# Altium PCB PCB3.PcbDoc
Units mm, origin at the board's own origin, x right, y up, seen from the top; angles counter-clockwise.
Board outline 58.75 x 34.1 mm, 2 copper layers (Top Layer, Bottom Layer); 56 components, 29 nets, 139 pads, 60 vias.
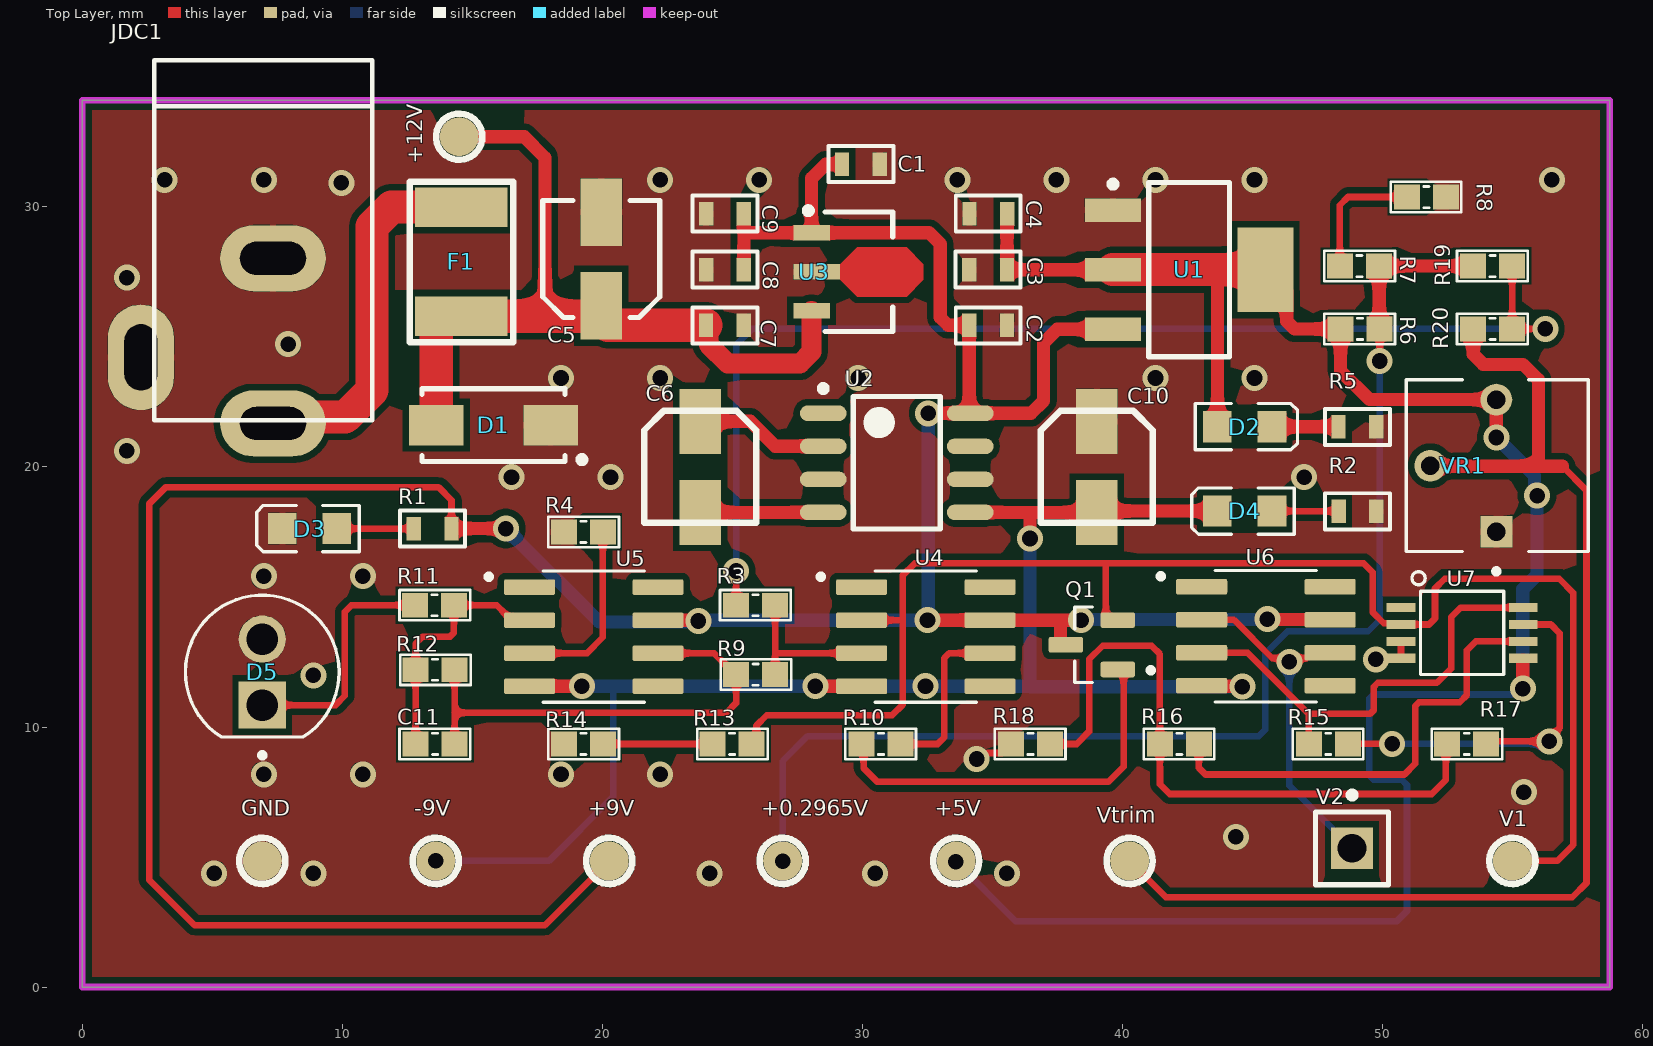
[diagram p0: Top Layer view]
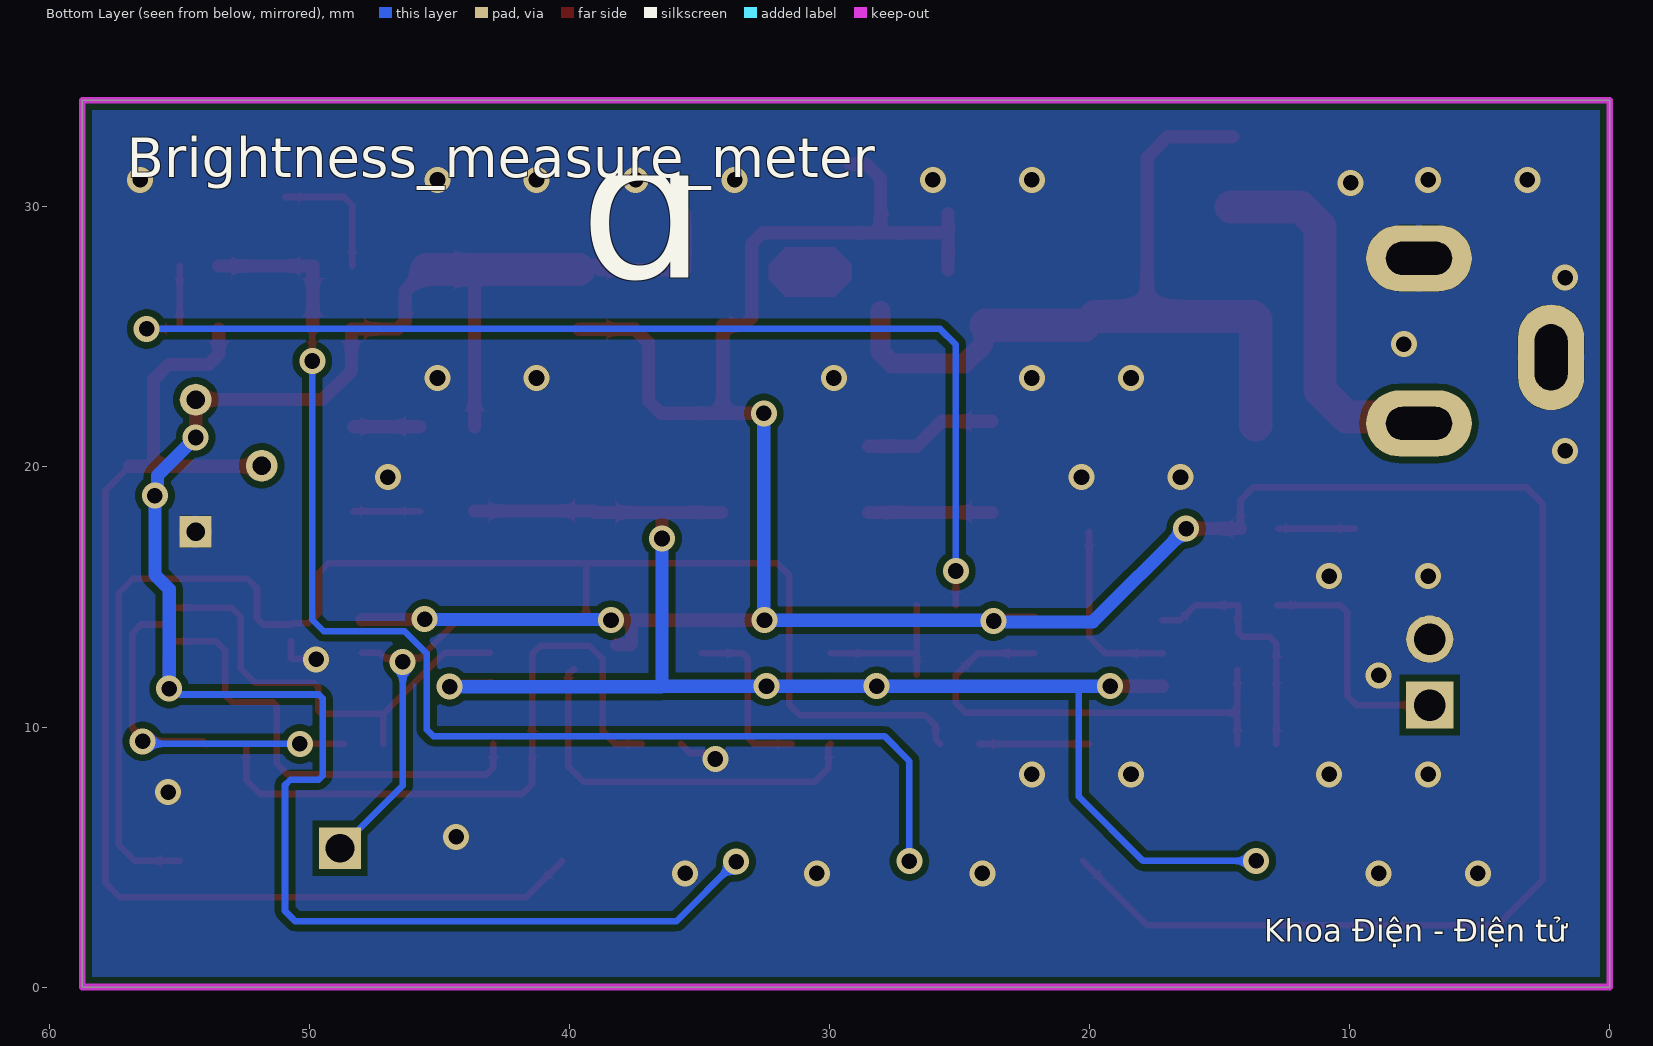
[diagram p1: Bottom Layer view, seen from below]
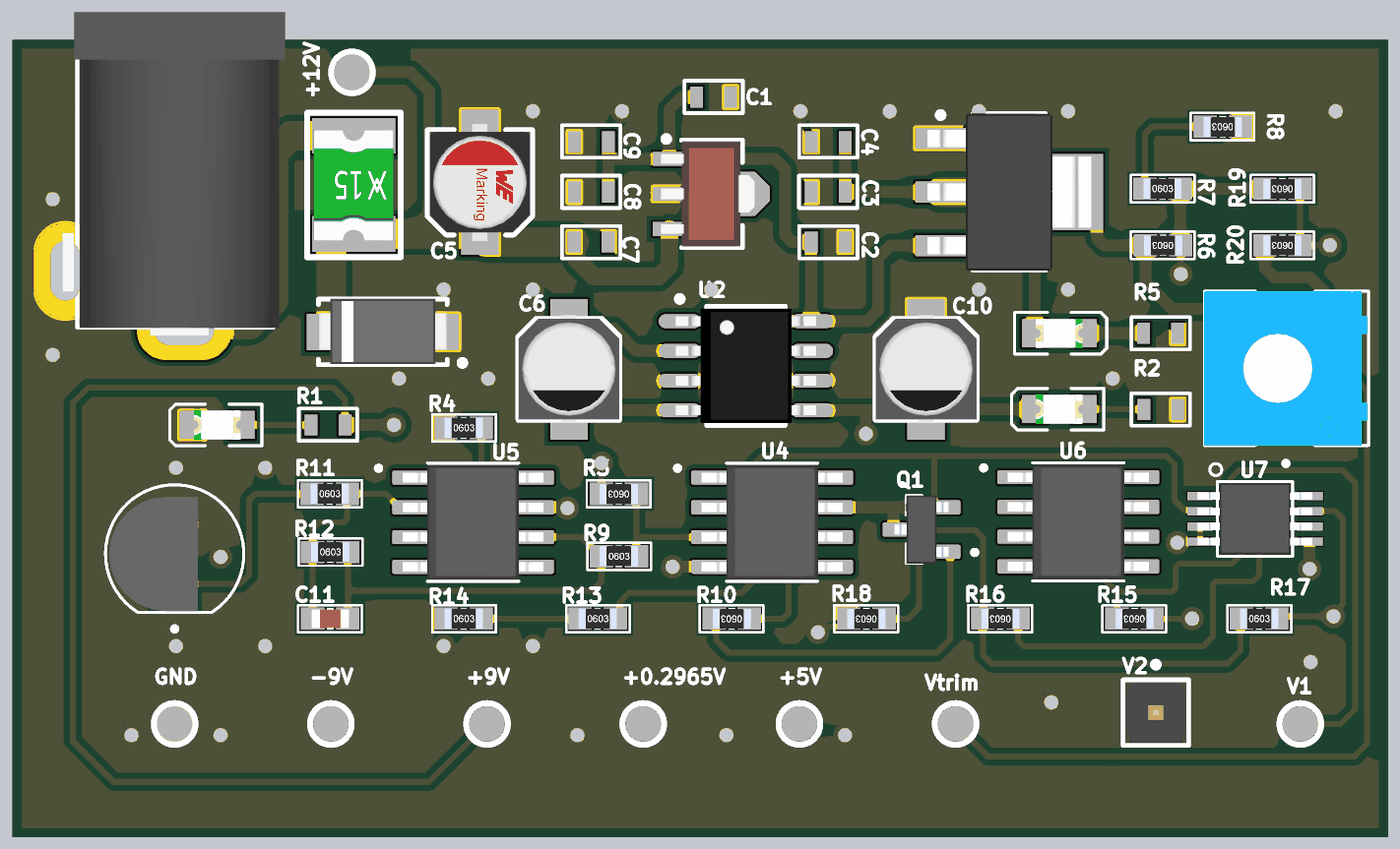
[diagram p2: 3D render of the assembled board from above, using the file's embedded part models]

## Layer stack, top to bottom
Top Solder: solder mask 0.0102, Solder Resist, Dk 3.5
Top Layer: signal copper 0.0356
Dielectric 1: dielectric 0.32, FR-4, Dk 4.8
Bottom Layer: signal copper 0.0356
Bottom Solder: solder mask 0.0102, Solder Resist, Dk 3.5

## Board outline
0,0 0,34.1 58.75,34.1 58.75,0

## Design rules (kind name [scope] priority, off if disabled: settings)
Clearance [All] p1: gap=0.254 ignorepadtopadclearanceinfootprint=FALSE
PlaneClearance [InNet('GND')] p1: clearance=0.508
PolygonConnect [InNet('GND') vs InNet('+12V')] p1: connectstyle=Direct reliefconductorwidth=0.254 reliefentries=4 polygonreliefangle="90 Angle" airgapwidth=0.254
RoutingVias [All] p1: holewidth=0.6 width=1 viastyle="Through Hole" minholewidth=0.6 minwidth=1 maxholewidth=0.6 maxwidth=1
SolderMaskExpansion [All] p1: expansion=0.102 istentingtop=FALSE
SupplyNets "Schematic Supply Nets_6" [InNet('Vtrim')] p1: voltage=0.000
SupplyNets "Schematic Supply Nets_5" [InNet('+9V')] p2: voltage=0.000
SupplyNets "Schematic Supply Nets_4" [InNet('+0.2965V')] p3: voltage=0.000
SupplyNets "Schematic Supply Nets_3" [InNet('GND')] p4: voltage=0.000
SupplyNets "Schematic Supply Nets_2" [InNet('+12V')] p5: voltage=0.000
SupplyNets "Schematic Supply Nets_1" [InNet('-9V')] p6: voltage=0.000
SupplyNets "Schematic Supply Nets" [InNet('+5V')] p7: voltage=0.000
UnRoutedNet [All] p1: checkbadconnections=TRUE
Width [All] p1: maxlimit=1.27 minlimit=0.254 preferedwidth=0.508 minimp=50.000000 maximp=50.000000 favimp=50.000000
28 further rules are at their usual default settings.

## Classes and differential pairs
component class Power_supply: +0.2965V +5V +9V +12V -9V C1 C2 C3 C4 C5 C6 C7 C8 C9 C10 D1 D2 D3 D4 F1 GND JDC1 R1 R2 R5 R6 R7 R8 U1 U2 U3 VR1 Vtrim
component class Measure: C11 "C 11" D5 Q1 R3 R4 R9 R10 R11 R12 R13 R14 R15 R16 R17 R18 R19 R20 U4 U5 U6 U7 V1 V2

## Components (designator, comment, footprint, x,y, rotation, side; value= is the part's Value field where it differs from the comment)
+0.2965V "Test_Point" TP_2MM 26.94,4.85 r90 top
+5V "Test_Point" TP_2MM 33.61,4.85 r0 top
+9V "Test_Point" TP_2MM 20.269,4.85 r0 top
+12V "Test_Point" TP_2MM 14.5,32.7 r180 top
-9V "Test_Point" TP_2MM 13.599,4.85 r0 top
C1 "10uF" CAP_0603 29.948,31.644 r0 top
C2 "100nF" CAP_0603 34.841,25.45 r180 top
C3 "10uF" CAP_0603 34.841,27.586 r0 top
C4 "100nF" CAP_0603 34.846,29.735 r0 top
C5 "22uF" WCAP-ASLI_D4H5.5 19.964,27.999 r270 top
C6 "10uF" "tu nhom 4 (b)" 23.767,20.004 r270 top
C7 "1uF" CAP_0603 24.717,25.45 r180 top
C8 "1uF" CAP_0603 24.723,27.586 r0 top
C9 "100nF" CAP_0603 24.723,29.735 r0 top
C10 "10uF" "tu nhom 4 (b)" 39.02,20.004 r270 top
C11 "220pF" "Tu 0603" 13.574,9.347 r180 top
D1 "D Schottky" SS34 15.818,21.606 r180 top
D2 "LED SMD" LED_0805_Blue 44.708,21.55 r0 top
D3 "LED SMD" LED_0805_Blue 8.748,17.63 r180 top
D4 "LED SMD" LED_0805_Blue 44.708,18.303 r180 top
D5 "SFH206K" SFH206K 6.928,12.366 r90 top
F1 "16V, 2.5A" Fuse_SMD_1812 14.575,27.874 r270 top
GND "Test_Point" TP_2MM 6.928,4.85 r0 top
JDC1 "Jac DC" DC0 4.8,24.85 r270 top
Q1 "LN2302LT1G" SOT95P240X120-3N 38.827,13.162 r180 top
R1 "5.6k" resistor_0603 13.478,17.63 r0 top
R2 "5.6k" resistor_0603 49.045,18.289 r0 top
R3 "1k" "tro smd 0603" 25.9,14.685 r180 top
R4 "2.7k" "TRO SMD 0603" 19.273,17.503 r0 top
R5 "5.6k" resistor_0603 49.039,21.55 r180 top
R6 "162k" "TRO SMD 0603" 49.141,25.309 r180 top
R7 "10.2k" "TRO SMD 0603" 49.115,27.727 r0 top
R8 "12R" "TRO SMD 0603" 51.692,30.381 r180 top
R9 "1k" "tro smd 0603" 25.9,12.015 r0 top
R10 "10R" "Tro smd 0603" 30.722,9.347 r180 top
R11 "10R" "Tro smd 0603" 13.548,14.685 r0 top
R12 "2.7k" "TRO SMD 0603" 13.574,12.198 r0 top
R13 "62R" "TRO SMD 0603" 24.998,9.347 r0 top
R14 "4.7R" "TRO SMD 0603" 19.273,9.347 r0 top
R15 "5.6k" "TRO SMD 0603" 47.921,9.347 r180 top
R16 "0R" "tro smd 0603" 42.197,9.347 r180 top
R17 "3.9k" "TRO SMD 0603" 53.245,9.347 r0 top
R18 "0R" "tro smd 0603" 36.472,9.347 r180 top
R19 "0R" "tro smd 0603" 54.243,27.727 r180 top
R20 "0R" "tro smd 0603" 54.243,25.309 r180 top
U1 "AMS1117-5V" "AMS1117-3.3V SOT223" 42.57,27.586 r0 top
U2 "ICL7662CBA-T" "SOP 8" 31.325,20.159 r0 top
U3 "78L09" SOT89 29.853,27.504 r0 top
U4 "OPA188AIDR" SOIC127P599X175-8N 32.446,13.473 r0 top
U5 "OPA188AIDR" SOIC127P599X175-8N 19.675,13.473 r0 top
U6 "OPA188AIDR" SOIC127P599X175-8N 45.522,13.49 r0 top
U7 "AD8237ARMZ" AD8237ARMZ 53.068,13.618 r270 top
V1 "Test_Point" TP_2MM 55.002,4.85 r0 top
V2 "JP 1x1 2.54" "JP 1x1 DT" 48.835,5.334 r0 top
VR1 "3362P-1-503" TRIM_3362P-1-503 54.385,20.05 r90 top
Vtrim "Test_Point" TP_2MM 40.281,4.85 r90 top

## Footprints (in the part's own frame and the unit in brackets; to place one, negate y for a bottom-side part, rotate by r counter-clockwise, add the part's x,y. Pads: shape width x height; smd on the part's side, far side on the other; paste and mask are expansions set on the pad)
AD8237ARMZ [mm]
  rect 0.35x1.1 smd mask+0.05: +IN(-0.325,-2.35) +VS(0.975,2.35) -IN(0.325,-2.35) -VS(0.975,-2.35) BW(-0.975,-2.35) FB(-0.325,2.35) REF(0.325,2.35) VOUT(-0.975,2.35)
  silkscreen extent -2.36,-1.93 1.6,1.6, body extent -1.5,-2.45 1.5,2.45, height 1.1
"AMS1117-3.3V SOT223" [mm] "SOT223, 4-Leads, Body 6.51x7.00mm, Pitch 2.29mm"
  rect 2.15x0.9 smd: 1(-2.93,2.29) 2(-2.93,0) 3(-2.93,-2.29)
  rect 2.15x3.25 smd: 4(2.93,0)
  silkscreen extent -3.05,-3.35 1.55,3.41, body extent -3.5,-3.35 3.5,3.35, height 1.8
CAP_0603 [mm]
  rect 0.55x0.9 smd: 1(-0.725,0) 2(0.725,0)
  silkscreen extent -1.25,-0.69 1.24,0.7, body extent -0.8,-0.45 0.8,0.45, height 0.5
DC0 [mil] "Jac DC input"
  oval 100x160 hole 50 slot 100 at 90 deg: 1(125,100) 2(-125,100)
  oval 160x100 hole 50 slot 100 at 0 deg: 3(25,-100)
  silkscreen extent -425,-80 120,250, body extent -410,-105 134,269, height 434
Fuse_SMD_1812 [mil] "Fuse SMD, size 1812"
  rect 60x140 smd: 0(-83.41,0) 1(82,0)
  silkscreen extent -122,-78 121,79, body extent -93,-67 93,67, height 18
"JP 1x1 DT" [mm] "1pins, 1 row, straight, gold plating"
  rect 1.6x1.6 hole 1.1: 1(0,0)
  silkscreen extent -1.4,-1.4 1.4,2.17, body extent -1.27,-1.27 1.27,1.27, height 8.54
LED_0805_Blue [mm]
  rect 1.1x1.2 smd: 1(-1.05,0) 2(1.05,0)
  silkscreen extent -1.91,-0.89 2.03,0.89, body extent -1,-0.63 1,0.62, height 0.68
resistor_0603 [mm]
  rect 0.55x0.9 smd: 1(-0.725,0) 2(0.725,0)
  silkscreen extent -1.25,-0.69 1.24,0.7, body extent -0.8,-0.45 0.8,0.45, height 0.5
SFH206K [mm]
  round 1.815 hole 1.21: A(1.016,0)
  rect 1.815x1.815 / inner round 1.815 / far side rect 1.815x1.815 hole 1.21: C(-1.524,0)
  silkscreen extent -3.55,-2.96 2.7,2.96, body extent -2.7,-1 2.2,2.8, height 7
SOIC127P599X175-8N [mm]
  rrect25% 1.97x0.6 smd: 1(-2.47,1.905) 2(-2.47,0.635) 3(-2.47,-0.635) 4(-2.47,-1.905) 5(2.47,-1.905) 6(2.47,-0.635) 7(2.47,0.635) 8(2.47,1.905)
  silkscreen extent -4.14,-2.52 1.95,2.52, body extent -3.01,-2.45 3.01,2.45, height 1.63
"SOP 8" [mm] "SOIC, 8-Leads, Body 4.9x3.9mm, Pitch 1.27mm, IPC High Density"
  oval 1.8x0.6 smd: 1(-2.825,1.905) 2(-2.825,0.635) 3(-2.825,-0.635) 4(-2.825,-1.905) 5(2.825,-1.905) 6(2.825,-0.635) 7(2.825,0.635) 8(2.825,1.905)
  silkscreen extent -2.95,-2.55 1.68,2.98, body extent -2.99,-2.45 3,2.45, height 1.6
SOT89 [mm] "SOT89, 3-Leads, Body 4.55x2.55mm, Pitch 1.50mm, Lead Span 4.1mm, IPC Medium Density"
  rect 1.4x0.6 smd: 1(-1.8,1.5) 3(-1.8,-1.5)
  rect 1.8x0.6 smd: 2(-1.6,0)
  Top Layer region: -0.7,0.3 -0.05,0.95 1.85,0.95 2.5,0.3 2.5,-0.3 1.85,-0.95 -0.05,-0.95 -0.7,-0.3
  silkscreen extent -2.05,-2.3 1.32,2.47, body extent -2.16,-2.25 1.84,2.25, height 1.5
SOT95P240X120-3N [mm]
  rrect25% 1.32x0.6 smd: 1(-1,0.95) 2(-1,-0.95) 3(1,0)
  silkscreen extent -2.37,-1.45 0.65,1.45, body extent -1.15,-1.46 1.15,1.46, height 1.21
SS34 [mm]
  rect 2.1x1.55 smd: 1(-2.2,0) 2(2.2,0)
  silkscreen extent -3.53,-1.4 2.75,1.45, body extent -2.75,-1.42 2.75,1.38, height 2.3
TP_2MM [mm] "Test point, 2mm."
  round 1.5 smd: 1(0,0)
  silkscreen extent -0.89,-0.89 0.89,0.89
TRIM_3362P-1-503 [mm]
  rect 1.222x1.222 hole 0.714: 1(-2.54,0)
  round 1.222 hole 0.714: 2(0,2.54) 3(2.54,0)
  silkscreen extent -4.16,-3.53 3.3,3.47, body extent -3.3,-3.49 3.3,3.49, height 4.88
"tro smd 0603" [mm] "Chip Capacitor, 2-Leads, Body 1,60x0,80mm, IPC Medium Density"
  rect 1x0.95 smd mask+0.076: 1(-0.75,0) 2(0.75,0)
  silkscreen extent -1.35,-0.58 1.37,0.58, body extent -0.82,-0.42 0.82,0.43, height 0.44
"TRO SMD 0603" [mm] "Chip Capacitor, 2-Leads, Body 1,60x0,80mm, IPC Medium Density"
  rect 1x0.95 smd mask+0.076: 1(-0.75,0) 2(0.75,0)
  silkscreen extent -1.35,-0.58 1.37,0.58, body extent -0.82,-0.42 0.82,0.43, height 0.44
"Tro smd 0603" [mm] "Chip Capacitor, 2-Leads, Body 1,60x0,80mm, IPC Medium Density"
  rect 1x0.95 smd mask+0.076: 1(-0.75,0) 2(0.75,0)
  silkscreen extent -1.35,-0.58 1.37,0.58, body extent -0.82,-0.42 0.82,0.43, height 0.44
"Tu 0603" [mm] "Chip Capacitor, 2-Leads, Body 1,60x0,80mm, IPC Medium Density"
  rect 1x0.95 smd mask+0.076: 1(-0.75,0) 2(0.75,0)
  silkscreen extent -1.35,-0.58 1.37,0.58, body extent -0.8,-0.4 0.8,0.4, height 0.9
"tu nhom 4 (b)" [mm]
  rect 2.5x1.6 smd: 1(-1.75,0) 2(1.75,0)
  silkscreen extent -2.15,-2.15 2.15,2.15, body extent -2.31,-2.15 2.29,2.15, height 3.91
WCAP-ASLI_D4H5.5 [mm] "Aluminium Electrolytic V-Chip SMT Capacitors, 4x5.5mm"
  rect 2.6x1.6 smd: 1(1.8,0) 2(-1.8,0)
  silkscreen extent -2.25,-2.25 2.25,2.25, body extent -2.5,-2.15 2.5,2.15, height 5.5

## Part data
+0.2965V +5V +9V +12V -9V GND V1 Vtrim: "Test point, 2mm radius"
C1 C3: library part 01060310010, "CAP, size 0603,10uF", Capacitance Tolerance=+/-10%, Operating Temperature="-55 to +125degC", Capacitance=10uF, ComponentLink1Description=Manufacturer, ComponentLink2Description=Datasheet, Mounting Technology=SMT, Packaging="Tape and Reel", Size=0603, Supply 2 Name=Thegioiic, Supply 2 URL=https://www.thegioiic.com/tu-gom-0603-10uf-16v
C2 C4 C9: library part 01060310410, "CAP, size 0603, 100nF", Capacitance Tolerance=+/-10%, Operating Temperature="-55 to +125degC", Capacitance=100nF, ComponentLink1Description=Manufacturer, ComponentLink1URL=http://www.we-online.de, ComponentLink2Description=Datasheet, ComponentLink2URL=https://www.we-online.com/catalog/datasheet/885012206095.pdf, Mounting Technology=SMT, Packaging="Tape and Reel", Size=0603, Supply 1 Name="Wurth Elektronik", Supply 1 SN=885012206095, Supply 1 URL=https://www.we-online.com/en/components/products/WCAP-CSGP-50VDC?sq=885012206095R#885012206095R, Supply 2 Name=Thegioiic, Supply 2 URL=https://www.thegioiic.com/tu-gom-0603-100nf-0-1uf-50v
C5: library part 865080340003, "V-Chip, D4 x H5.5mm, 22uF, 16V", Capacitance Tolerance=+/-20%, Leakage Current=3.52uA, Operating Temperature Max=105°C, Operating Temperature Min=-55°C, Rated Voltage (DC)=16V, Ripple Current=90mA, Capacitance=22uF, Category="Aluminum Electrolytic Capacitors", ComponentLink2Description="Datasheet Link", ComponentLink2URL=https://www.we-online.com/redexpert/spec/865080340003?ad, Diameter=4mm, Dissipation Factor=16%, Endurance=2000h, Height=5.5mm, Mount="Surface Mount", Packaging="Tape and Reel", Supply 1 Name=Mouser, Supply 1 SN=710-865080340003, Supply 1 URL=https://www.mouser.com/ProductDetail/Wurth-Elektronik/865080340003?qs=0KOYDY2FL2%252BowmC4S50IuQ%3D%3D, Supply 2 Name=thegioiic, Supply 2 URL=https://www.thegioiic.com/tu-nhom-smd-22uf-16v-4x5-4mm
C6 C10: library part "Tu Nhom 10uF 16V", "Dán", Chung_Loai=Dán, Don_Vi=Con, Ma_Hang=MH001458, So_Chan=2, Ten_Linh_Kien="Tụ Nhôm 10uF 16V 4x5MM"
C7 C8: library part 01060310510, "CAP, size 0603, 1uF", Capacitance Tolerance=+/-10%, Operating Temperature="-55 to +125degC", Capacitance=1uF, ComponentLink1Description=Manufacturer, ComponentLink1URL=http://www.we-online.de, ComponentLink2Description=Datasheet, ComponentLink2URL=https://www.we-online.com/components/products/datasheet/885012206126.pdf, Mounting Technology=SMT, Packaging="Tape and Reel", Size=0603, Supply 1 Name="Wurth Elektronik", Supply 1 SN=885012206126, Supply 1 URL=https://www.we-online.com/en/components/products/WCAP-CSGP-50VDC?sq=885012206126#885012206126, Supply 2 Name=Thegioiic, Supply 2 URL=https://www.thegioiic.com/tu-gom-0603-1uf-50v
C11: library part "Tu 0603 220pF 50V 10%", "Dán"
D1: "Schottky Diode", Code_JEDEC=DO-214-AA, LatestRevisionDate=17-Jul-2002, LatestRevisionNote="Re-released for DXP Platform.", PackageDescription="DO-214-AA/SMB; 2 C-Bend Leads; Body 5.3 x 3.6 mm, inc. leads (LxW)", PackageReference=SMB, Published=8-Jun-2000, Publisher="Altium Limited"
D2 D3 D4: "LED"
D5: "photodiode, 850nm", Package=None, Availability="In Stock", Check_prices=https://www.snapeda.com/parts/L08R5000Q1/LED+Technology/view-part/?ref=eda, MF="LED Technology", MP=L08R5000Q1, Price=None, SnapEDA_Link=https://www.snapeda.com/parts/L08R5000Q1/LED+Technology/view-part/?ref=snap
F1: library part 061812200008, "Resettable Fuse, Size 1812, 8V, 2A", Hold Current=2A, Manufacturer=Littelfuse, Threshold Current=100A, Threshold Voltage=8V, Trip Current=4A, ComponentLink1Description="Datasheet link", ComponentLink1URL=https://www.littelfuse.com/~/media/electronics/product_specifications/resettable_ptcs/littelfuse_ptc_minismdc300f_2_product_specification.pdf.pdf, ComponentLink2Description="Supply 1 URL", ComponentLink2URL=https://www.mouser.vn/ProductDetail/Littelfuse/MINISMDC200F-2?qs=F6FIpiMdEVbPu4q%2F42CC1w%3D%3D, ComponentLink3Description="Supply 2 URL", ComponentLink3URL=https://www.digikey.com/en/products/detail/littelfuse-inc/MINISMDC200F-2/1045898?s=N4IgTCBcDaIAQFkCSA5JBlBARAwmADPgGIC0EAugL5A, ComponentLink4Description="Supply 3 URL", ComponentLink4URL=https://www.thegioiic.com/cau-chi-tu-phuc-hoi-1812-8v-2a, Mounting Technology=SMT/SMD, Size=1812, Supply 1 Name=Mouser, Supply 1 SN=650-MINISMDC200F-2, Supply 2 Name=Digikey, Supply 2 SN=MINISMDC200F-2TR-ND, Supply 3 Name=Thegioiic, Supply 3 SN=N/A
JDC1: library part DCIN, "Jac DC input"
Q1: library part MOSFET, "SOT-23-3, MOSFET kênh N, 20V, 2.3A"
R1 R2 R5: library part 0006035621, "RES, 5.6k Ohm, size 0603, 1%", Rated Power=1/4W, Resistance Tolerant=+/-1%, ComponentLink1Description="Datasheet link", ComponentLink1URL=https://api.pim.na.industrial.panasonic.com/file_stream/main/fileversion/4484, ComponentLink2Description="Supply 1 URL", ComponentLink2URL=https://www.mouser.vn/ProductDetail/Panasonic/ERJ-UP3F5601V?qs=sGAEpiMZZMvdGkrng054twq3eZrCFN89ezYxgAsnxBTZYD17cS%252B65A%3D%3D, ComponentLink3Description="Supply 2 URL", ComponentLink3URL=https://www.digikey.com/en/products/detail/panasonic-electronic-components/ERJ-UP3F5601V/12092890, Mounting Technology=SMT, Resistance=5.6k, Size=0603, Supply 1 Name=Mouser, Supply 1 SN=667-ERJ-UP3F5601V, Supply 2 Name=Digikey, Supply 2 SN="10-ERJ-UP3F5601VTR-ND 10-ERJ-UP3F5601VCT-ND 10-ERJ-UP3F5601VDKR-ND"
R3 R9: library part "Tro 0603 1% 1k", "Dán", Chung_Loai=Dán, Don_Vi=Con, Ma_Hang=MH006334, So_Chan=2, Ten_Linh_Kien="Trở 0603 1% 1k"
R4 R12: library part "tro 0603 5% 2.7k", "dán"
R6: library part "Tro 0603 1% 162k", "Dán"
R7: library part "tro 0603 1% 10.2k", "Dán"
R8: library part "tro 0805 1% 12R", "Dán"
R10 R11: library part "Tro 0603 5% 10R", "Dán", Chung_Loai=Dán, Don_Vi=Con, Ma_Hang=MH006317, So_Chan=2, Ten_Linh_Kien="Trở 0603 5% 10R"
R13: library part "Tro 0603 1% 62R", "Dán"
R14: library part "Tro 0603 1% 4.7R", "Dán"
R15: library part "Tro 0603 1% 5.6k", "Dán"
R16 R18 R19 R20: library part "Tro 0603 1% 0R", "Dán", Chung_Loai=Dán, Don_Vi=Con, Ma_Hang=MH005792, So_Chan=2, Ten_Linh_Kien="Trở 0603 1% 0R"
R17: library part "Tro 0805 1% 3.9k", "Dán"
U1: "AMS1117-5V, OUT 5V 1A."
U2: Package=None, Availability=Unavailable, MF="{'manufacturer': u'Analog Devices Inc./Maxim Integrated'}", MP=ICL7662CBA+T, Price=None
U3: "78L09, OUT 9V, 0.1A"
U4 U5 U6: "Precision, Low-Noise, Rail-to-Rail Output, 36V Zero-Drift Operational Amplifier 8-SOIC -40 to 125", Package="SOIC-8 Texas Instruments", Digi-Key_Part_Number=296-41346-1-ND, DigiKey-Purchase-URL=https://snapeda.com/shop?store=DigiKey&id=1236132, MF="Texas Instruments", Mouser-Purchase-URL=https://snapeda.com/shop?store=Mouser&id=1236132, MP=OPA188AIDR, SnapEDA_Link=https://www.snapeda.com/parts/OPA188AIDR/Texas%20Instruments/view-part/1236132/?ref=snap, Texas_Instruments-Purchase-URL=https://snapeda.com/shop?store=Texas+Instruments&id=1236132
U7: "Micropower, Zero Drift, True Rail-to-Rail Instrumentation Amplifier", Package="MSOP-8 Analog Devices", Availability="In Stock", Check_prices=https://www.snapeda.com/parts/AD8237ARMZ/Analog+Devices/view-part/?ref=eda, MF="Analog Devices", MP=AD8237ARMZ, Price=None, Purchase-URL=https://pricing.snapeda.com/search?q=AD8237ARMZ&ref=eda, SnapEDA_Link=https://www.snapeda.com/parts/AD8237ARMZ/Analog+Devices/view-part/?ref=snap
V2: library part "JP 1x1 2.54 Duc Cong", "Cắm", Chung_Loai=Cắm, Don_Vi=Con, Ma_Hang=MH000904, Ten_Linh_Kien="Jump Đơn Đực 2.54MM 1x40P Cong Đứng"
VR1: "50 kOhms 0.5W, 1/2W PC Pins Through Hole Trimmer Potentiometer Cermet 1 Turn Top Finger Adjustment", Package="3116 Bourns", Availability=Warning, Check_prices=https://www.snapeda.com/parts/3362P-1-503/Bourns/view-part/1483011/?ref=eda, MF=Bourns, MP=3362P-1-503, Price=None, Purchase-URL=https://pricing.snapeda.com/search/part/3362P-1-503/?ref=eda, SnapEDA_Link=https://www.snapeda.com/parts/3362P-1-503/Bourns/view-part/1483011/?ref=snap

## Via types
v1: diameter 1, hole 0.6, Top Layer to Bottom Layer, tented both sides, 57 vias
v2: diameter 1, hole 0.6, Top Layer to Bottom Layer, 3 vias

## Nets (pads, with @x,y where several pads share a name; then routed paths per layer and width w, separated by ;. In a path a pad name is that pad's centre, name@x,y a point inside that pad or via, vN(x,y) a via of type N, cw(c..) or ccw(c..) an arc to the next point about the centre after c; other vN are vias at no path point)
+0.2965V: +0.2965V.1 R6.1 R7.2 R19.2 | length 48
  Top Layer w0.254: v2(26.94,4.84) +0.2965V.1 ; R6.1@49.878,25.321 R6.1 49.9,25.3 v1(49.9,24.075)
  Top Layer w0.508: R6.1@49.878,25.321 49.878,27.714 R7.2 R19.2
  Bottom Layer w0.254: v2(26.94,4.84) 26.94,8.69 27.9,9.65 45.25,9.65 45.5,9.9 45.5,12.829 46.352,13.681 49.456,13.681 49.9,14.125 v1(49.9,24.075)
+5V: +5V.1 C3.2 C4.2 D2.1 R6.2 U1.2 U1.4 U7.+VS VR1.3 | length 77.2
  Top Layer w0.254: v2(33.6,4.825) 33.61,4.835 +5V.1
  Top Layer w0.508: C4.2 35.568,29.733 35.568,27.588 C3.2 38.817,27.586 U1.2@39.015,27.784 ; 43.65,27.586 43.658,27.577 D2.1 ; U1.4 46.321,26.765 46.321,25.606 46.619,25.309 R6.2 48.391,23.709 49.51,22.59 VR1.3 54.383,22.587 v1(54.383,21.133) ; v1(55.4,11.475) U7.+VS@55.4,12.564
  Top Layer w1.27: U1.2 43.65,27.586 U1.4
  Bottom Layer w0.254: v2(33.6,4.825) 35.9,2.525 50.301,2.525 50.55,2.525 50.95,2.925 50.95,7.775 50.75,7.975 49.649,7.975 49.5,8.124 49.5,11.1 49.65,11.25 54.973,11.25 55.198,11.475 v1(55.4,11.475)
  Bottom Layer w0.508: v1(54.383,21.133) 55.856,19.661 55.856,18.994 v1(55.95,18.9) 55.95,15.85 55.4,15.3 v1(55.4,11.475)
+9V: +9V.1 C1.1 C2.2 C8.2 C9.2 Q1.3 R1.2 U1.3 U2.8 U3.1 U4.7 U5.7 U6.7 | length 124.1
  Top Layer w0.254: R1.2 14.203,18.722 13.7,19.225 3.225,19.225 2.575,18.575 2.575,4.125 4.325,2.375 17.794,2.375 +9V.1
  Top Layer w0.508: R1.2 v1(16.295,17.63) ; U5.7 23.667,14.108 v1(23.7,14.075) ; C8.2 25.448,28.975 ; C9.2 25.448,28.975 ; 27.968,29.735 28.053,29.65 ; C1.1 28.598,31.644 28.053,31.1 28.053,29.65 ; v1(32.508,14.108) U4.7 37.627,14.108 ; v1(32.536,22.064) U2.8 ; Q1.3@38.187,13.162 Q1.3 37.673,13.162 37.627,13.208 37.627,14.108 ; v1(38.413,14.108) 37.627,14.108 ; U1.3 37.496,25.296 36.975,24.775 36.975,22.55 36.489,22.064 34.158,22.064 34.116,22.107 C2.2 33.298,25.45 33,25.748 33,28.575 32.571,29.004 U3.1 ; v1(45.575,14.15) 45.587,14.138 47.979,14.138 U6.7 ; 25.448,28.975 25.477,29.004 U3.1 ; U3.1 28.053,29.65
  Bottom Layer w0.508: v1(16.295,17.63) 19.882,14.043 23.668,14.043 23.733,14.108 v1(32.508,14.108) 32.536,14.136 v1(32.536,22.064) ; v1(38.413,14.108) 38.434,14.129 45.554,14.129 v1(45.575,14.15)
+12V: +12V.1 C5.1 C7.2 D1.2 F1.1 U3.3 | length 30.6
  Top Layer w0.508: +12V.1 17,32.7 17.8,31.9 17.8,25.791
  Top Layer w0.762: C7.2 24.029,25.45 24.098,25.381 24.098,24.702 24.825,23.975 27.6,23.975 28.053,24.428 U3.3
  Top Layer w1.27: D1.2 13.618,25.664 13.745,25.791 F1.1 17.8,25.791 C5.1@19.799,25.791 ; C5.1@20.225,25.45 C7.2
-9V: -9V.1 C10.2 D4.2 U2.5 U4.4 U5.4 U6.4 | length 59.1
  Top Layer w0.508: U5.4 v1(19.218,11.568) ; v1(28.193,11.568) U4.4 ; U2.5 36.375,18.254 ; v1(36.45,17.25) 36.45,18.179 36.375,18.254 ; U6.4 43.069,11.568 44.601,11.568 v1(44.619,11.55) ; D4.2 39.069,18.303 C10.2 36.375,18.254
  Bottom Layer w0.254: v2(13.599,4.85) 17.95,4.85 20.425,7.325 20.425,11.568
  Bottom Layer w0.508: v1(19.218,11.568) 20.425,11.568 v1(28.193,11.568) v1(32.432,11.568) 36.45,11.568 ; v1(36.45,17.25) 36.45,11.568 ; v1(44.619,11.55) 36.468,11.55 36.45,11.568
GND: C1.2 C2.1 C3.1 C4.1 C5.2 C7.1 C8.1 C9.1 C10.1 D1.1 D3.2 D5.A GND.1 JDC1.2 JDC1.3 R2.2 R4.1 R5.1 R8.1 R14.1 R18.2 U1.1 U2.3 U2.6 U3.2 U7.-IN U7.-VS VR1.1 | length 3.6
  Top Layer w0.254: v1(34.4,8.769) 34.602,8.769 34.832,8.999 35.374,8.999 R18.2 ; v1@49.7,12.65 49.704,12.646 v1@49.75,12.646 ; v1(49.75,12.6) 49.771,12.621 50.689,12.621 U7.-VS@50.714,12.646 ; U7.-VS@50.718,12.646 U7.-IN ; VR1.1@54.126,17.25 VR1.1
  other v1: 5.08,4.369 8.89,4.369 24.13,4.369 30.494,4.372 35.56,4.369 44.369,5.772 55.444,7.497 6.985,8.179 10.795,8.179 18.415,8.179 22.225,8.179 8.89,11.989 6.985,15.799 10.795,15.799 16.51,19.609 20.32,19.609 46.99,19.609 1.719,20.622 18.415,23.419 22.225,23.419 29.845,23.419 41.275,23.419 45.085,23.419 7.919,24.722 1.723,27.279 9.969,30.922 3.175,31.039 6.985,31.039 22.225,31.039 26.035,31.039 33.655,31.039 37.465,31.039 41.275,31.039 45.085,31.039 56.515,31.039
NetC6_1: C6.1 U2.2 | length 5.1
  Top Layer w0.508: C6.1 25.696,21.754 26.656,20.794 U2.2
NetC6_2: C6.2 U2.4 | length 4.7
  Top Layer w0.508: C6.2 U2.4
NetC11_1: C11.1 R9.1 R12.2 U5.6 | length 18.3
  Top Layer w0.254: C11.1 14.324,10.55 ; R12.2 14.324,10.55 ; U5.6 24.302,12.838 25.125,12.015 R9.1 25.15,10.925 24.775,10.55 14.324,10.55
NetC11_2: C11.2 R11.2 R12.1 U5.2 | length 9.7
  Top Layer w0.254: C11.2 12.824,13.199 13.1,13.475 14.15,13.475 14.298,13.624 R11.2 15.944,14.685 16.52,14.108 U5.2
NetD2_2: D2.2 R5.2 | length 2.6
  Top Layer w0.508: D2.2 R5.2
NetD3_1: D3.1 R1.1 | length 3
  Top Layer w0.254: D3.1 R1.1
NetD4_1: D4.1 R2.1 | length 2.6
  Top Layer w0.254: D4.1 48.305,18.303 R2.1
NetD5_C: D5.C R11.1 | length 9.4
  Top Layer w0.254: D5.C 9.742,10.842 10.1,11.2 10.1,14.425 10.36,14.685 R11.1
NetF1_0: F1.0 JDC1.1 | length 14.4
  Top Layer w1.27: JDC1.1 7.583,21.918 10.118,21.918 11.15,22.95 11.15,29.249 11.894,29.993 F1.0
NetQ1_1: Q1.1 R10.2 | length 15.3
  Top Layer w0.254: R10.2 30.05,9.269 30.05,8.425 30.587,7.888 39.463,7.888 40.05,8.475 40.05,12.039 39.877,12.212 Q1.1
NetQ1_2: Q1.2 R13.2 U4.2 U7.+IN V1.1 | length 57.6
  Top Layer w0.254: R13.2 25.929,9.528 25.929,10.054 26.325,10.45 31.15,10.45 31.55,10.85 31.55,14.125 ; U4.2 31.533,14.108 31.55,14.125 ; Q1.2 39.542,14.112 39.369,14.285 39.369,16.281 39.35,16.3 ; V1.1 56.725,4.85 57.342,5.467 57.342,15.158 56.8,15.7 52.4,15.7 52.025,15.325 52.025,14.175 51.793,13.943 U7.+IN 50.67,13.991 50.057,13.991 49.625,14.423 49.625,15.95 49.275,16.3 39.35,16.3 ; 31.55,14.125 31.55,15.825 32.025,16.3 39.35,16.3
NetR3_1: R3.1 R9.2 U4.3 | length 6
  Top Layer w0.254: R9.2 26.65,12.825 ; R3.1 26.65,12.825 ; U4.3 26.664,12.838 26.65,12.825
NetR3_2: R3.2 R19.1 R20.1 | length 45.1
  Top Layer w0.254: R3.2 v1(25.15,16) ; R19.1 R20.1 v1(56.266,25.309)
  Bottom Layer w0.254: v1(25.15,16) 25.15,24.701 25.758,25.309 v1(56.266,25.309)
NetR4_2: R4.2 U5.3 | length 7.2
  Top Layer w0.254: U5.3 19.413,12.838 20.023,13.448 R4.2 R4.2@20.07,17.456
NetR7_1: R7.1 R8.2 | length 5
  Top Layer w0.254: R7.1 48.365,30.065 48.681,30.381 R8.2
NetR10_1: R10.1 U4.6 | length 6.7
  Top Layer w0.254: R10.1 32.897,9.347 33.15,9.6 33.15,12.65 33.338,12.838 U4.6
NetR13_1: R13.1 R14.2 | length 4.2
  Top Layer w0.254: R14.2 R13.1
NetR15_1: R15.1 R17.2 U7.FB | length 16.1
  Top Layer w0.254: R15.1 48.674,9.35 v1(50.381,9.35) ; R17.2 54.098,9.45 v1(56.425,9.45) 56.425,9.572 56.825,9.972 56.825,13.6 56.482,13.943 U7.FB
  Bottom Layer w0.254: v1(50.381,9.35) 56.325,9.35 v1(56.425,9.45)
NetR15_2: R15.2 U6.3 U7.VOUT | length 17.9
  Top Layer w0.254: U6.3 44.82,12.855 47.171,10.504 ; R15.2 47.171,10.504 ; U7.VOUT 53.018,14.593 52.643,14.218 52.643,12.243 52.1,11.7 49.824,11.7 49.675,11.551 49.675,10.652 49.526,10.504 47.171,10.504
NetR16_1: R16.1 U7.REF | length 17.9
  Top Layer w0.254: R16.1 42.947,8.428 43.2,8.175 50.85,8.175 51.262,8.587 51.262,10.801 51.411,10.95 52.975,10.95 53.25,11.225 53.25,12.95 53.593,13.293 U7.REF
NetR16_2: R16.2 R17.1 R18.1 | length 25.3
  Top Layer w0.254: R18.1 38.247,9.347 38.725,9.825 38.725,12.605 39.245,13.125 41.125,13.125 41.447,12.803 R16.2 41.447,8.453 41.45,8.45 41.45,7.8 41.825,7.425 51.9,7.425 52.443,7.968 52.443,9.296 R17.1
NetU6_2: U6.2 U6.6 V2.1 | length 13.9
  Top Layer w0.254: U6.2 44.291,14.125 45.769,12.647 46.278,12.647 v1(46.421,12.504) 46.564,12.647 47.098,12.647 47.307,12.855 U6.6
  Bottom Layer w0.254: v1(46.421,12.504) 46.421,7.748 V2.1
Vtrim: R20.2 VR1.2 Vtrim.1 | length 47.2
  Top Layer w0.254: Vtrim.1 41.681,3.45 57.3,3.45 57.85,4 57.85,19.1 56.925,20.025
  Top Layer w0.508: VR1.2 51.87,20.025 55.702,20.025 ; R20.2 53.493,24.332 53.884,23.941 55.409,23.941 56,23.35 56,20.323 55.702,20.025 ; 56.925,20.025 55.702,20.025
pads on no net: U2.1 U2.7 U4.1 U4.5 U4.8 U5.1 U5.5 U5.8 U6.1 U6.5 U6.8 U7.BW

## Polygon pours and split planes (outlines as drawn)
GND on Top Layer "GND_L01_P001" (solid, remove dead copper, pour order 1): 0,34.1 58.75,34.1 58.75,0 0,0
GND on Bottom Layer "GND_L02_P000" (solid, remove dead copper, pour order 0): 0,34.1 58.75,34.1 58.75,0 0,0

## Keep-outs
Keep-Out Layer:
  the board outline again, w0.254

## Other copper
Top Layer:
  text "String" at 41.475,-5.8 h1.52

## Silkscreen, mask and mechanical layers (free items; w line width, h text height)
Bottom Overlay:
  text "Brightness_measure_meter" at 57.025,31.15 h1.52
  text "b" at 34.726,23.496 h20
  text "Khoa Điện - Điện tử" at 13.3,1.45 h1.5